# EAGLE board TPS799 (EAGLE 9.5.2)
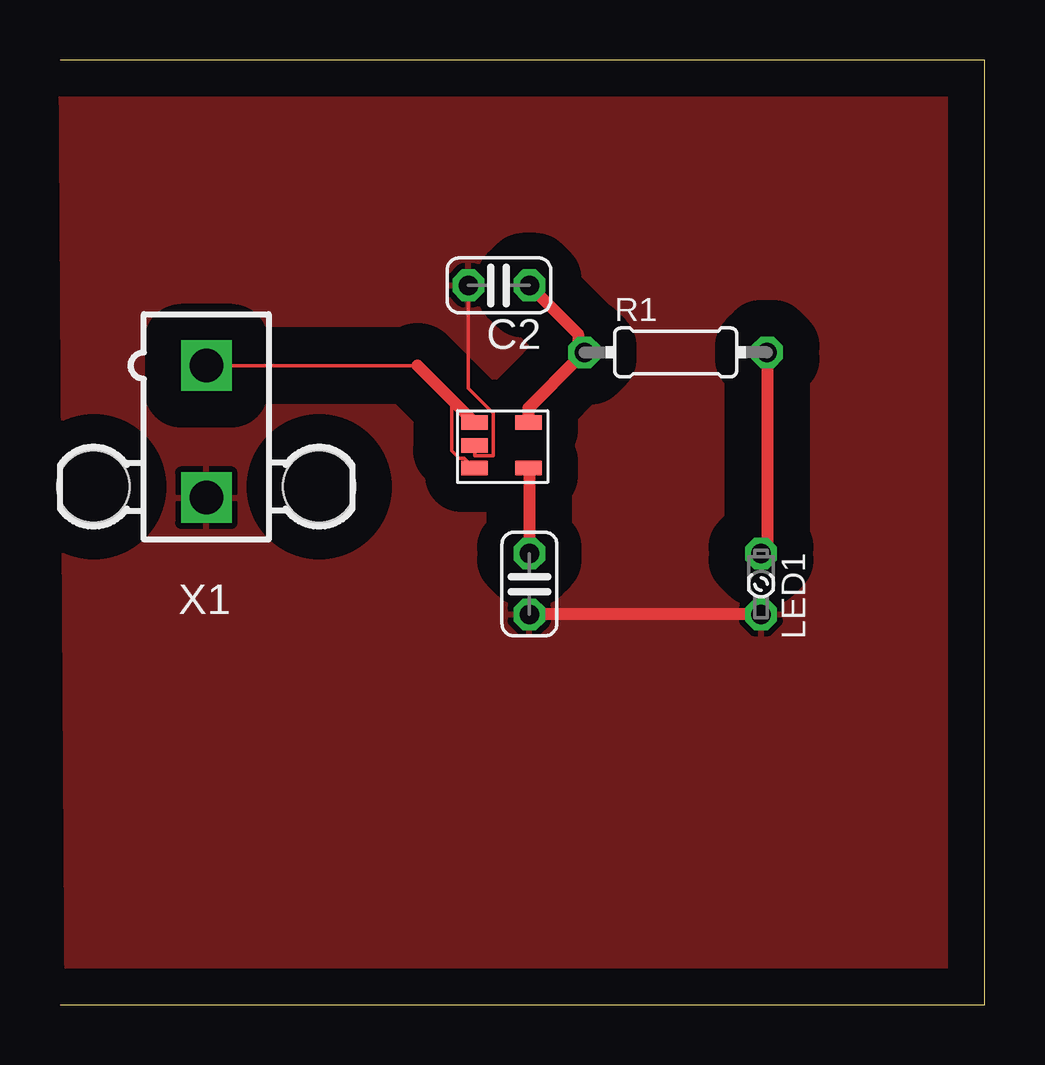
[diagram p0: board, top side]

Size 38.53 x 39.36 mm. Coordinates in mm from the lower left corner, seen from the top.
Outline: 0,0 38.53,0 38.53,39.36 0,39.36
Copper layers (1*16): Top 0.035mm / dielectric 1.5mm / Bottom 0.035mm
Design rules "default": minimum track width 6mil, minimum drill 0.35mm, track to track 6mil, track to pad 6mil, pad to pad 6mil, via to via 6mil, smd to smd 6mil, copper to edge 40mil, drill to drill 6mil, minimum pad ring 10mil, minimum via ring 8mil, stop-mask expansion 4mil, vias tented up to drill 0mil, thermal gap 10mil

## Footprints (pad centres in the part's own frame; a part is rotated, then mirrored left to right if it is on the bottom)
C025-024X044 = drill 0.813 octagon: 1 -1.27,0; 2 1.27,0
LSU260 = drill 0.813 octagon: A -1.27,0; K 1.27,0
0204/7 = drill 0.813 octagon: 1 -3.81,0; 2 3.81,0
TPS799 = smd 1.1 x 0.6: EN 0,0; GND 0,0.95; IN 0,1.9; NR 2.25,0; VOUT 2.25,1.9
5566-2 = drill 1.4 square: 1 0,-2.75; 2 0,2.75 | hole 3: 4.7,2.29; -4.7,2.29

## Placement (x,y rotation side)
C1  [C025-024X044]  19.56,17.53 270 top
C2  [C025-024X044]  18.29,29.97 180 top
LED1  [LSU260]  29.21,17.53 270 top
R1  [0204/7]  25.65,27.18 0 top
U$1  TPS799  [TPS799]  17.27,22.35 0 top
X1  5566-2  [5566-2]  6.1,23.88 180 top

## Library data of the parts
C1 C2 = rcl; SPICEPREFIX: C
LED1 = led
R1 = rcl; SPICEPREFIX: R
U$1 = TPS799
X1 = con-molex; MF: MOLEX; OC_FARNELL: 1822072; OC_NEWARK: unknown

## Nets
GND: C1.2 C2.2 LED1.K U$1.GND X1.2
N$1: C1.1 U$1.NR
N$2: LED1.A R1.2
N$5: C2.1 R1.1 U$1.VOUT
N$16: U$1.EN U$1.IN X1.1

## Tracks (layer width: path | path; a pad name or v marks a point on that pad's centre or on a via)
GND
  Top 0.152: C2.2 17.02,25.68 18.05,24.65 18.05,22.88 17.27,22.88 U$1.GND
  Top 0.508: LED1.K C1.2
  pour Top (isolate 1.524): 38.61,0 38.61,39.37 0,39.12 0.25,0
N$1
  Top 0.508: U$1.NR 19.56,22.32 C1.1
N$2
  Top 0.508: R1.2 29.46,19.05 LED1.A
N$5
  Top 0.508: U$1.VOUT 19.52,24.86 21.59,26.92 | 21.59,26.92 R1.1 | C2.1 21.59,27.94 21.59,26.92
N$16
  Top 0.152: 17.05,22.58 U$1.EN 16.85,22.77 16.63,22.77 16.49,22.91 16.32,23.08 16.32,25.21 | 14.9,26.63 X1.1
  Top 0.508: U$1.IN 16.32,25.21 14.9,26.63